# EAGLE board mi6k_portable_pcb (EAGLE 4.11)
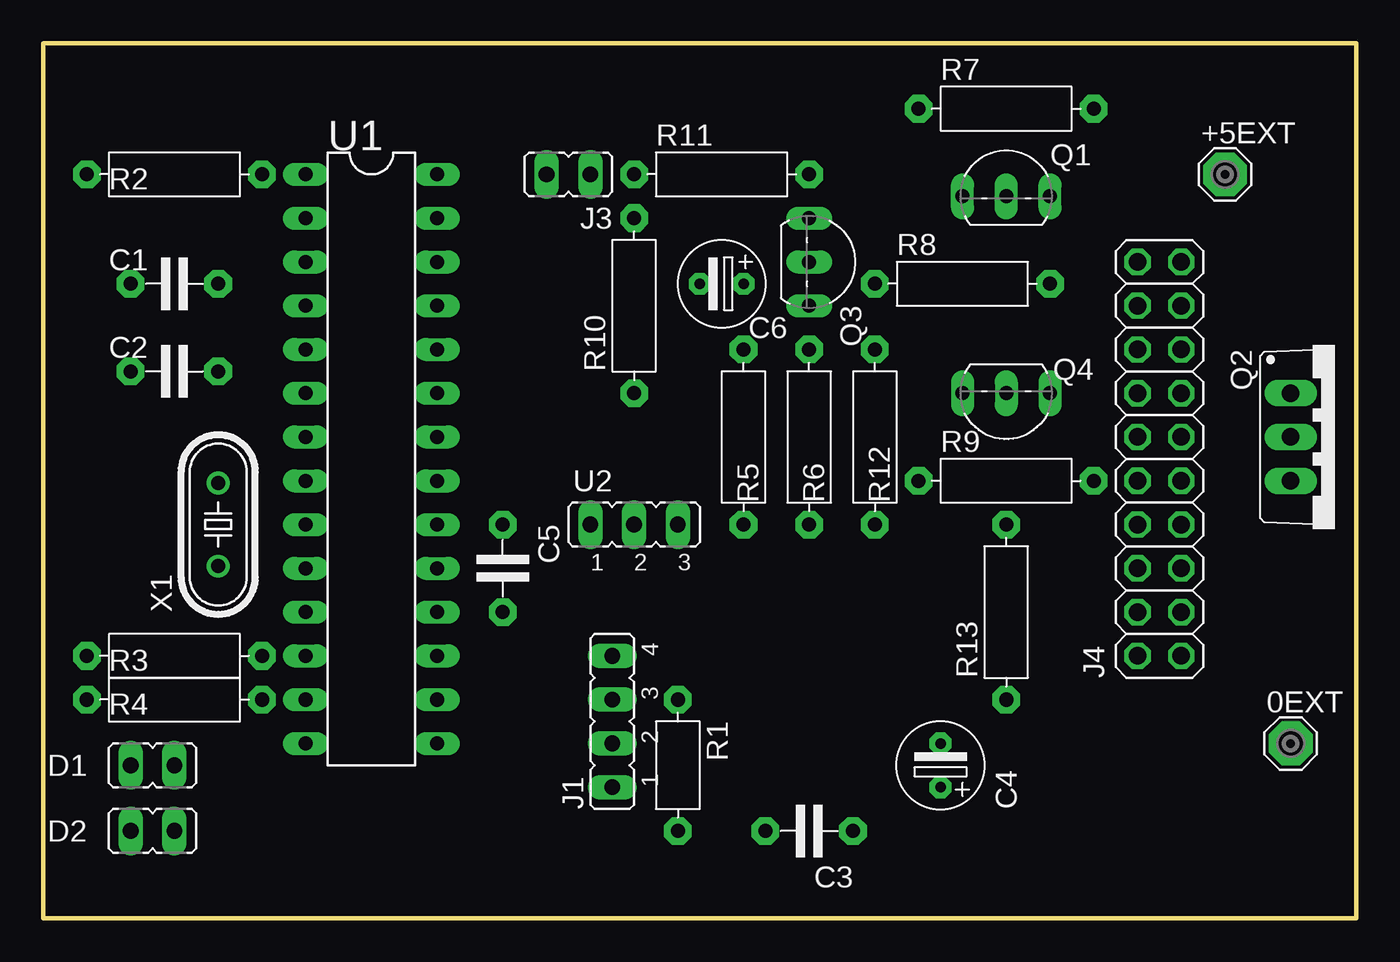
[diagram p0: board, top side]
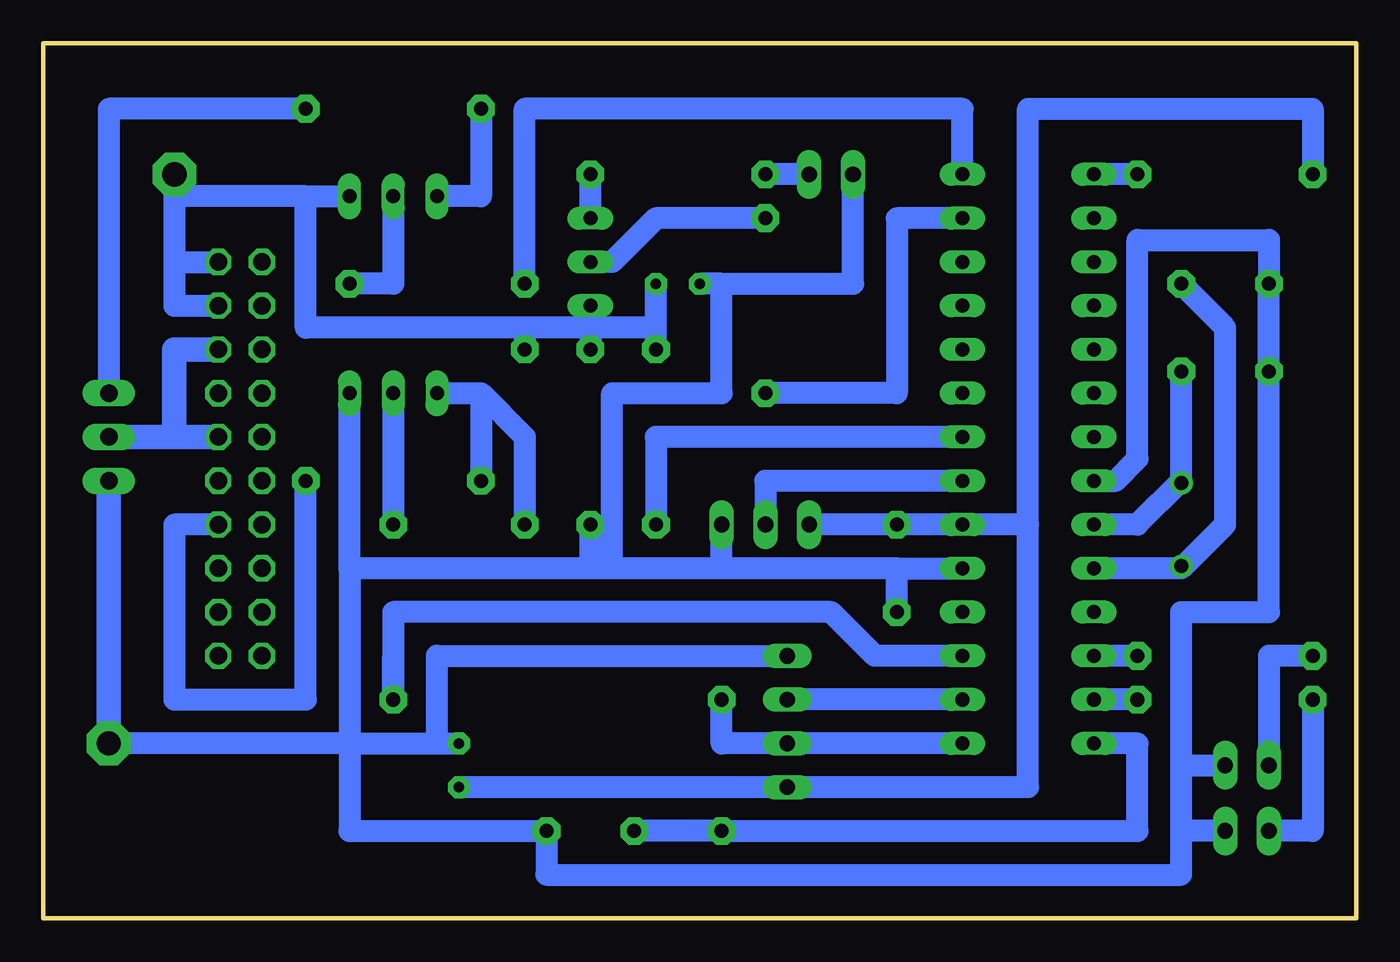
[diagram p1: board, bottom side, seen from below]

Size 76.2 x 50.8 mm. Coordinates in mm from the lower left corner, seen from the top.
Outline: 0,50.8 76.2,50.8 76.2,0 0,0 0,50.8
Copper layers (1*16): Top 0.035mm / dielectric 1.5mm / Bottom 0.035mm
Design rules "default": minimum track width 10mil, minimum drill 24mil, track to track 8mil, track to pad 8mil, pad to pad 8mil, via to via 8mil, smd to smd 8mil, copper to edge 40mil, drill to drill 8mil, minimum pad ring 10mil, minimum via ring 8mil, stop-mask expansion 4mil, vias tented up to drill 0mil, thermal gap 10mil

## Footprints (pad centres in the part's own frame; a part is rotated, then mirrored left to right if it is on the bottom)
SE14 = drill 1.397 pad 2.54 octagon: MP 0,0
C-5 = drill 0.813 pad 1.6 octagon: 1 -2.54,0; 2 2.54,0
ES-2,5L = drill 0.61 pad 1.27 octagon: 1 0,0; 2 2.54,0
JP1Y = drill 0.914 long: 1 0,-1.27; 2 0,1.27
JP4 = drill 0.914 long: 1 -3.81,0; 2 -1.27,0; 3 1.27,0; 4 3.81,0
2X10 = drill 1.016 octagon: 1 -11.43,-1.27; 2 -11.43,1.27; 3 -8.89,-1.27; 4 -8.89,1.27; 5 -6.35,-1.27; 6 -6.35,1.27; 7 -3.81,-1.27; 8 -3.81,1.27; 9 -1.27,-1.27; 10 -1.27,1.27; 11 1.27,-1.27; 12 1.27,1.27; 13 3.81,-1.27; 14 3.81,1.27; 15 6.35,-1.27; 16 6.35,1.27; 17 8.89,-1.27; 18 8.89,1.27; 19 11.43,-1.27; 20 11.43,1.27
TO92-EBC = drill 0.813 long: B 0,-1.27; C -2.54,-1.27; E 2.54,-1.27
TO220V = drill 1.016 long: 1 -2.54,-2.54; 2 0,-2.54; 3 2.54,-2.54
R-7,5 = drill 0.813 pad 1.6 octagon: 1 -3.81,0; 2 3.81,0
R-10 = drill 0.813 pad 1.6 octagon: 1 -5.08,0; 2 5.08,0
DIL28-3 = drill 0.813 long: 1 -16.51,-3.81; 2 -13.97,-3.81; 3 -11.43,-3.81; 4 -8.89,-3.81; 5 -6.35,-3.81; 6 -3.81,-3.81; 7 -1.27,-3.81; 8 1.27,-3.81; 9 3.81,-3.81; 10 6.35,-3.81; 11 8.89,-3.81; 12 11.43,-3.81; 13 13.97,-3.81; 14 16.51,-3.81; 15 16.51,3.81; 16 13.97,3.81; 17 11.43,3.81; 18 8.89,3.81; 19 6.35,3.81; 20 3.81,3.81; 21 1.27,3.81; 22 -1.27,3.81; 23 -3.81,3.81; 24 -6.35,3.81; 25 -8.89,3.81; 26 -11.43,3.81; 27 -13.97,3.81; 28 -16.51,3.81
JP2Y = drill 0.914 long: 1 -2.54,0; 2 0,0; 3 2.54,0
HC49/S = drill 0.813 round: 1 -2.413,0; 2 2.413,0

## Placement (x,y rotation side)
0EXT  [SE14]  72.39,10.16 0 top
+5EXT  [SE14]  68.58,43.18 0 top
C1  [C-5]  7.62,36.83 0 top
C2  [C-5]  7.62,31.75 0 top
C3  [C-5]  44.45,5.08 180 top
C4  [ES-2,5L]  52.07,7.62 90 top
C5  [C-5]  26.67,20.32 270 top
C6  [ES-2,5L]  40.64,36.83 180 top
D1  [JP1Y]  6.35,8.89 90 top
D2  [JP1Y]  6.35,5.08 90 top
J1  [JP4]  33.02,11.43 90 top
J3  [JP1Y]  30.48,43.18 90 top
J4  [2X10]  64.77,26.67 90 top
Q1  [TO92-EBC]  55.88,43.18 0 top
Q2  [TO220V]  74.93,27.94 270 top
Q3  [TO92-EBC]  45.72,38.1 270 top
Q4  [TO92-EBC]  55.88,29.21 180 top
R1  [R-7,5]  36.83,8.89 270 top
R2  [R-10]  7.62,43.18 0 top
R3  [R-10]  7.62,15.24 0 top
R4  [R-10]  7.62,12.7 0 top
R5  [R-10]  40.64,27.94 90 top
R6  [R-10]  44.45,27.94 90 top
R7  [R-10]  55.88,46.99 0 top
R8  [R-10]  53.34,36.83 0 top
R9  [R-10]  55.88,25.4 0 top
R10  [R-10]  34.29,35.56 90 top
R11  [R-10]  39.37,43.18 0 top
R12  [R-10]  48.26,27.94 90 top
R13  [R-10]  55.88,17.78 90 top
U1  [DIL28-3]  19.05,26.67 270 top
U2  [JP2Y]  34.29,22.86 0 top
X1  [HC49/S]  10.16,22.86 90 top

## Library data of the parts
0EXT +5EXT = solpad
C1-C6 R1-R13 = discrete
D1 D2 J1 J3 U2 = jumper
J4 = pinhead
Q1-Q4 = transistor
U1 = microchip
X1 = crystal

## Nets
C5: 0EXT.MP C1.1 C3.1 C4.2 C5.2 C6.2 D1.1 D2.1 J1.4 J3.2 Q2.3 Q4.C R6.1 U1.8 U1.19 U2.3
J4: J4.7 R9.2
R11: R8.1 U1.28
S$1: R5.1 U1.22
S$2: J4.11 J4.15 Q2.2
S$3: Q4.B R13.2
S$4: Q2.1 R7.2
S$5: Q1.C R7.1
S$6: Q1.B R8.2
S$7: Q3.C R11.2
S$8: U1.21 U2.2
S$9: +5EXT.MP C6.1 J4.17 J4.19 Q1.E Q3.E R5.2 R6.2 R12.2
S$10: Q4.E R9.1 R12.1
S$11: C3.2 R1.2 U1.14
S$12: J3.1 R11.1
S$13: Q3.B R10.2
S$14: R10.1 U1.27
S$15: C4.1 C5.1 J1.1 R2.1 U1.20 U2.1
S$16: R13.1 U1.17
S$17: J1.2 R1.1 U1.15
S$18: J1.3 U1.16
S$19: R2.2 U1.1
S$20: R3.2 U1.12
S$21: R4.2 U1.13
S$22: C1.2 U1.10
S$23: C2.2 U1.9
S$24: D1.2 R3.1
S$25: D2.2 R4.1

## Tracks (layer width: path | path; a pad name or v marks a point on that pad's centre or on a via)
C5
  Bottom 1.27: J1.4 53.34,15.24 53.34,10.16 | J3.2 29.21,36.83 36.83,36.83 | 53.34,10.16 C4.2 | 58.42,10.16 0EXT.MP | 58.42,10.16 53.34,10.16 | 58.42,10.16 58.42,5.08 C3.1 46.99,2.54 10.16,2.54 10.16,5.08 | 36.83,36.83 C6.2 | 36.83,36.83 36.83,30.48 43.18,30.48 43.18,20.32 | 58.42,20.32 Q4.C | 58.42,20.32 58.42,10.16 | 44.45,20.32 R6.1 | 44.45,20.32 58.42,20.32 | 43.18,20.32 44.45,20.32 | 36.83,20.32 U2.3 | 36.83,20.32 43.18,20.32 | 26.67,20.32 U1.19 | 26.67,20.32 36.83,20.32 | C5.2 26.67,20.32 | 10.16,8.89 10.16,17.78 5.08,17.78 C1.1 5.08,39.37 12.7,39.37 12.7,26.67 13.97,25.4 U1.8 | 10.16,8.89 D1.1 | 10.16,5.08 10.16,8.89 | D2.1 10.16,5.08
  Bottom 1.422: 0EXT.MP Q2.3
J4
  Bottom 1.27: J4.7 68.58,22.86 68.58,12.7 60.96,12.7 R9.2
R11
  Bottom 1.27: U1.28 22.86,46.99 48.26,46.99 R8.1
S$1
  Bottom 1.27: U1.22 40.64,27.94 R5.1
S$2
  Bottom 1.422: J4.15 68.58,33.02 68.58,27.94 J4.11 Q2.2
S$3
  Bottom 1.27: Q4.B R13.2
S$4
  Bottom 1.27: R7.2 72.39,46.99 Q2.1
S$5
  Bottom 1.27: R7.1 50.8,41.91 Q1.C
S$6
  Bottom 1.27: Q1.B 55.88,36.83 R8.2
S$7
  Bottom 1.27: Q3.C R11.2
S$8
  Bottom 1.27: U1.21 34.29,25.4 U2.2
S$9
  Bottom 1.27: J4.17 68.58,35.56 68.58,38.1 | 68.58,38.1 J4.19 | 68.58,41.91 68.58,38.1 | 60.96,41.91 Q1.E | 60.96,41.91 68.58,41.91 | 60.96,41.91 60.96,34.29 48.26,34.29 | 48.26,34.29 R12.2 | 44.45,34.29 48.26,34.29 | 44.45,34.29 R6.2 | 40.64,34.29 44.45,34.29 | R5.2 40.64,34.29 | 40.64,34.29 C6.1 | 44.45,34.29 Q3.E | +5EXT.MP 68.58,41.91
S$10
  Bottom 1.27: Q4.E 50.8,30.48 | 50.8,30.48 48.26,27.94 R12.1 | 50.8,30.48 R9.1
S$11
  Bottom 1.27: U1.14 12.7,10.16 12.7,5.08 R1.2 C3.2
S$12
  Bottom 1.27: J3.1 R11.1
S$13
  Bottom 1.27: R10.2 40.64,40.64 43.18,38.1 Q3.B
S$14
  Bottom 1.27: U1.27 26.67,40.64 26.67,30.48 R10.1
S$15
  Bottom 1.27: U2.1 C5.1 U1.20 19.05,22.86 | 19.05,22.86 19.05,7.62 J1.1 C4.1 | 19.05,22.86 19.05,46.99 2.54,46.99 R2.1
S$16
  Bottom 1.27: U1.17 27.94,15.24 30.48,17.78 55.88,17.78 R13.1 55.88,15.24
S$17
  Bottom 1.27: U1.15 J1.2 36.83,10.16 R1.1
S$18
  Bottom 1.27: U1.16 J1.3
S$19
  Bottom 1.27: R2.2 U1.1
S$20
  Bottom 1.27: R3.2 U1.12
S$21
  Bottom 1.27: R4.2 U1.13
S$22
  Bottom 1.27: U1.10 10.16,20.32 7.62,22.86 7.62,34.29 C1.2
S$23
  Bottom 1.27: U1.9 12.7,22.86 10.16,25.4 C2.2
S$24
  Bottom 1.27: R3.1 5.08,15.24 D1.2
S$25
  Bottom 1.27: R4.1 2.54,5.08 D2.2